# Altium PCB Left Eye Module.PcbDoc
Units mm, origin at the board's own origin, x right, y up, seen from the top; angles counter-clockwise.
Board outline 44.75 x 16 mm, 2 copper layers (Top Layer, Bottom Layer), stack 1.697 mm thick; 7 components, 8 nets, 23 pads, 11 vias.
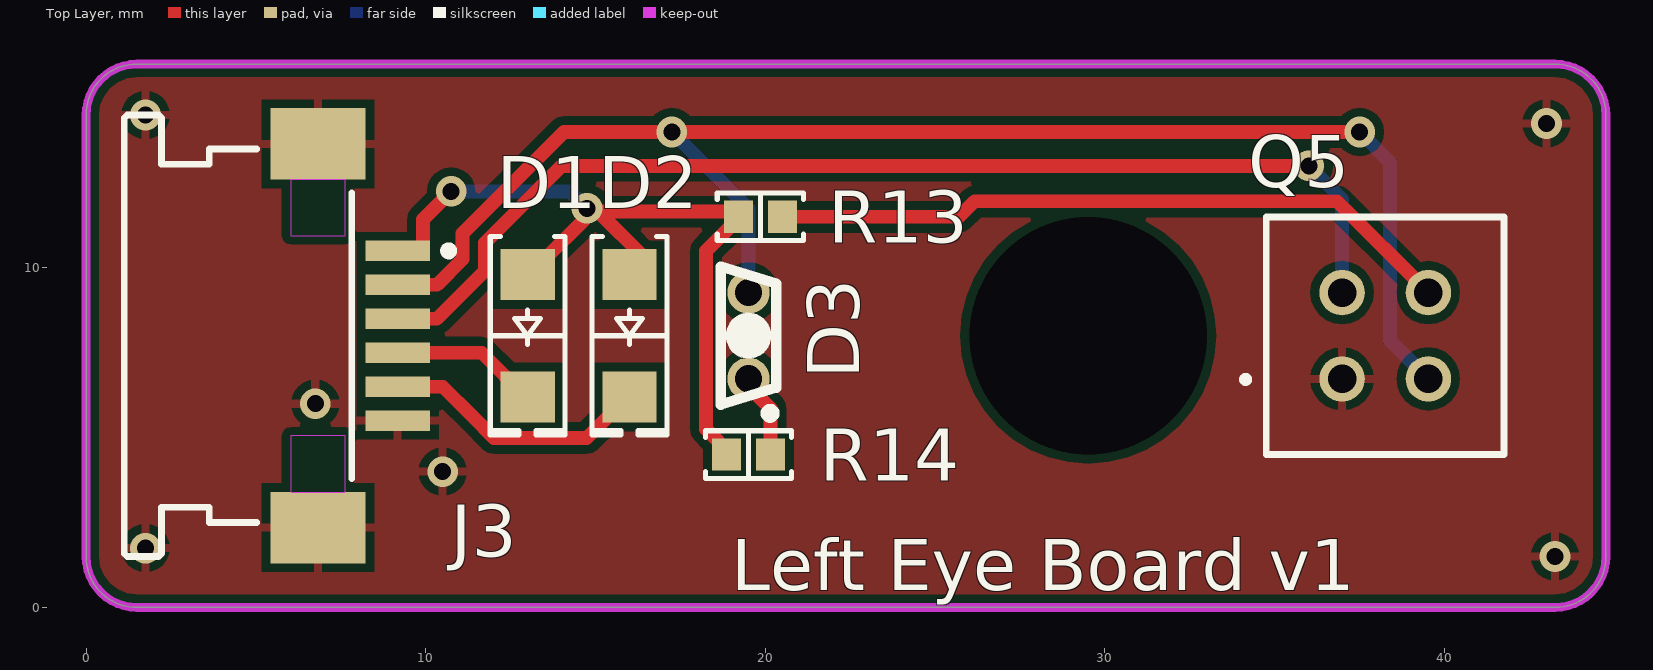
[diagram p0: Top Layer view]
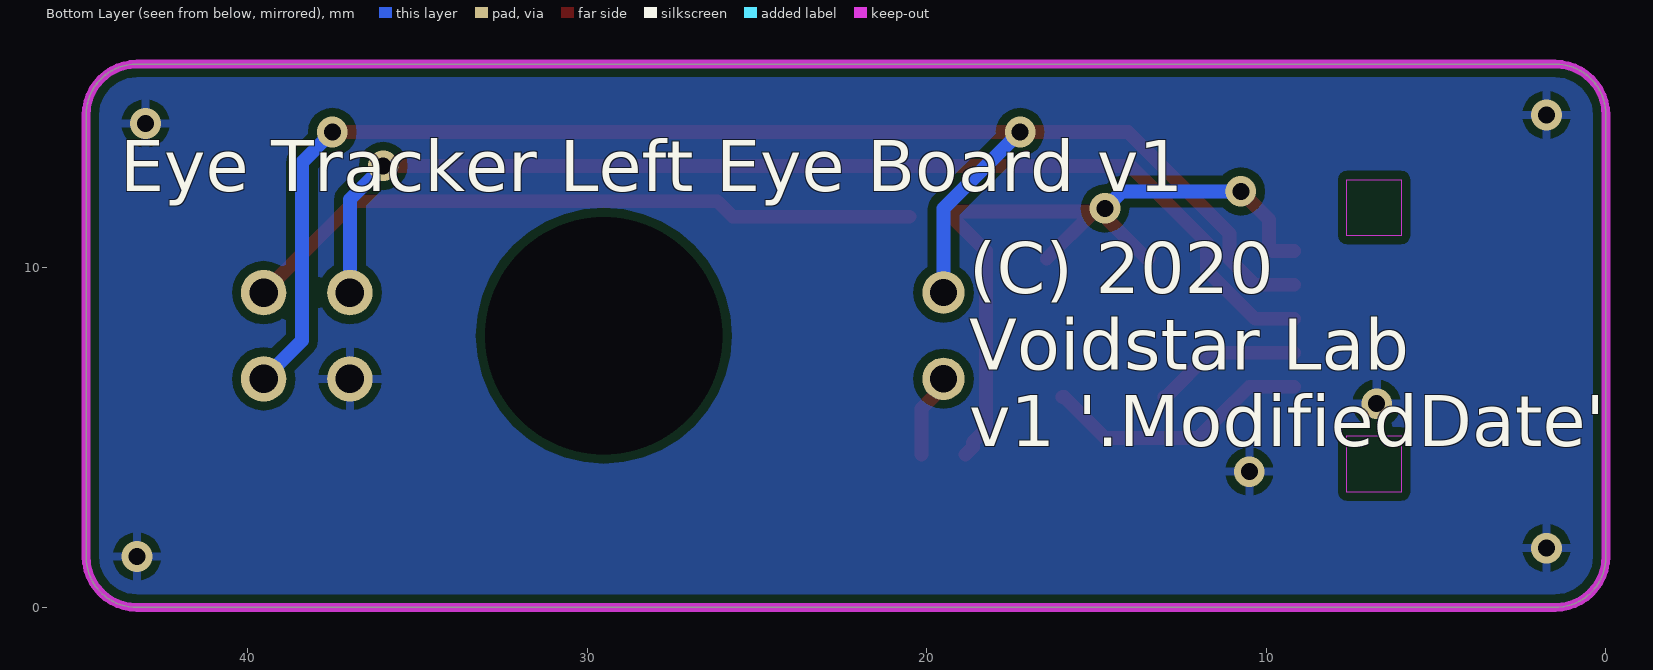
[diagram p1: Bottom Layer view, seen from below]
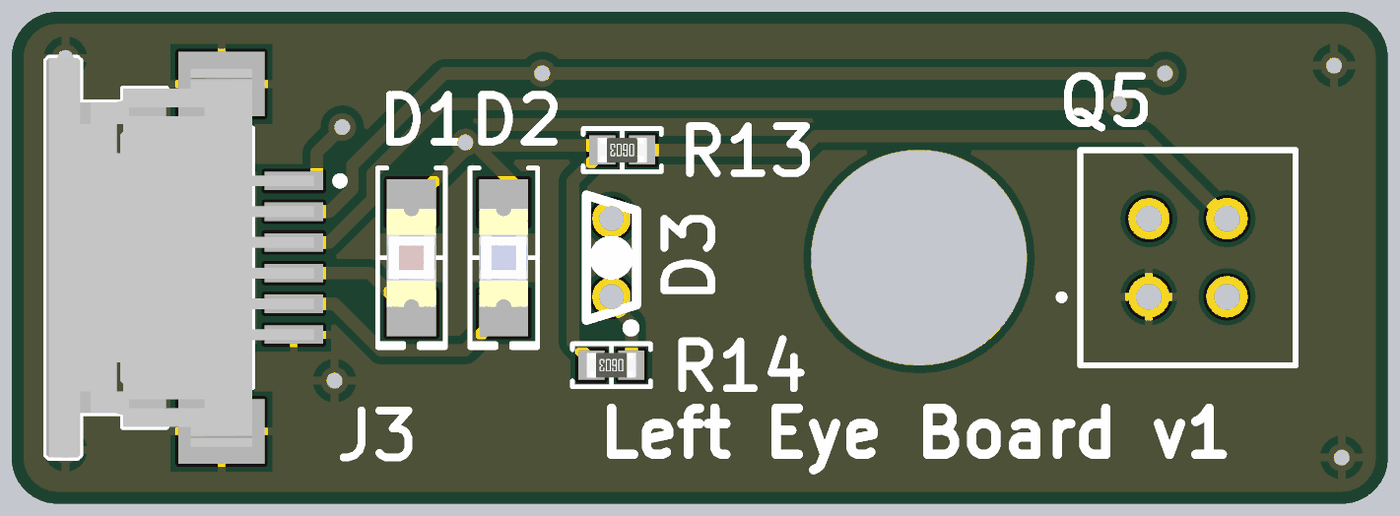
[diagram p2: 3D render of the assembled board from above, using the file's embedded part models]

## Layer stack, top to bottom
Top Solder: solder mask 0.0102, Solder Resist, Dk 3.5
Top Layer: signal copper 0.0356
Dielectric 1: dielectric 1.6256, FR-4, Dk 4.8
Bottom Layer: signal copper 0.0356
Bottom Solder: solder mask 0.0102, Solder Resist, Dk 3.5

## Board outline
1.5,0 cw(c1.5,1.5) 0,1.5 0,14.5 cw(c1.5,14.5) 1.5,16 43.25,16 cw(c43.25,14.5) 44.75,14.5 44.75,1.5 cw(c43.25,1.5) 43.25,0

## Design rules (kind name [scope] priority, off if disabled: settings)
Clearance [All] p1: gap=0.254 ignorepadtopadclearanceinfootprint=FALSE except(0: Arc-Hole Track-Hole SMDPad-Hole THPad-Hole Via-Hole Fill-Hole Poly-Hole Region-Hole Text-Hole)
PolygonConnect [All] p1: connectstyle=Relief reliefconductorwidth=0.254 reliefentries=4 polygonreliefangle="90 Angle" airgapwidth=0.254
RoomDefinition Sheet3 [InComponentClass('Sheet3')] p1: confinementstyle=ConfineIn formatcopy=TRUE lockcomponents=FALSE outline 0.5,0.75 42.25,0.75 42.25,15.25 0.5,15.25
RoutingVias [All] p1: holewidth=0.5 width=0.9 viastyle="Through Hole" minholewidth=0.5 minwidth=0.9 maxholewidth=1 maxwidth=1.4
SolderMaskExpansion "Tent Vias" [IsVia] p1: expansion=-5 istentingtop=TRUE
SolderMaskExpansion [All] p2: expansion=0.102 istentingtop=FALSE
Width [All] p1: maxlimit=0.813 minlimit=0.254 preferedwidth=0.406 minimp=50.000000 maximp=50.000000 favimp=50.000000
30 further rules are at their usual default settings.

## Components (designator, comment, footprint, x,y, rotation, side; value= is the part's Value field where it differs from the comment)
D1 "Red" "LED 1206_3216 RED" 13,8 r270 top
D2 "Blue" "LED 1206_3216 BLUE" 16,8 r270 top
D3 "=Value" OP269A 19.504,8.003 r90 top
J3 "52271-0679" MOLX-52271-0679 8,8 r270 top
Q5 "CNY70" CNY70 38.25,8 r0 top
R13 "100 Ohms" "RES 0603_1608" 19.854,11.503 r180 top
R14 "100 Ohms" "RES 0603_1608" 19.504,4.503 r180 top

## Footprints (in the part's own frame and the unit in brackets; to place one, negate y for a bottom-side part, rotate by r counter-clockwise, add the part's x,y. Pads: shape width x height; smd on the part's side, far side on the other; paste and mask are expansions set on the pad)
CNY70 [mm]
  round 1.34 hole 0.84: 1(-1.27,-1.27) 2(1.27,-1.27) 3(1.27,1.27) 4(-1.27,1.27)
  silkscreen extent -4.2,-3.5 3.5,3.5, body extent -3.5,-3.5 3.5,3.5, height 6
"LED 1206_3216 BLUE" [mm] "Chip Diode, 2-Leads, Body 3.13x1.55mm, IPC Medium Density"
  rect 1.5x1.6 smd: 1(-1.8,0) 2(1.8,0)
  silkscreen extent -2.92,-1.1 2.92,1.1, body extent -1.6,-0.8 1.6,0.8, height 0.9
"LED 1206_3216 RED" [mm] "Chip Diode, 2-Leads, Body 3.13x1.55mm, IPC Medium Density"
  rect 1.5x1.6 smd: 1(-1.8,0) 2(1.8,0)
  silkscreen extent -2.92,-1.1 2.92,1.1, body extent -1.6,-0.8 1.6,0.8, height 0.9
MOLX-52271-0679 [mm] "FPC Connector, 6-Leads, Right Angle, Pitch 1.0 mm, Mated Height 3.0 mm, SMT"
  rect 0.6x1.9 smd: 1(-2.5,1.175) 2(-1.5,1.175) 3(-0.5,1.175) 4(0.5,1.175) 5(1.5,1.175) 6(2.5,1.175)
  rect 2.1x2.8 smd: MP1(-5.65,-1.175) MP2(5.65,-1.175)
  Keep-Out Layer region: -4.6,-1.975 -2.95,-1.975 -2.95,-0.375 -4.6,-0.375
  Keep-Out Layer region: 2.95,-1.975 4.6,-1.975 4.6,-0.375 2.95,-0.375
  silkscreen extent -6.5,-6.87 6.5,2.8, body extent -6.5,-6.87 6.5,1.83, height 3.01
OP269A [mm] "Optek/TT Electronics Slim IR Emitter"
  round 1.25 hole 0.8: 1(-1.27,0) 2(1.27,0)
  silkscreen extent -2.41,-0.81 2.03,0.81, body extent -2.03,-0.81 2.79,0.82, height 6.1
"RES 0603_1608" [mm] "Chip Resistor, 2-Leads, Body 1.60x0.80mm, IPC Medium Density"
  rect 0.85x0.95 smd: 1(-0.65,0) 2(0.65,0)
  silkscreen extent -1.27,-0.7 1.27,0.7, body extent -0.8,-0.4 0.8,0.4, height 0.45

## Part data
D1: library part SML-LX1206IW-TR, "LED RED DIFFUSED 1206 SMD", Current - Test=20mA, Device Package="1206 (3216 Metric)", Lens Color=White, Manufacturer="Lumex Opto/Components Inc.", Millicandela Rating=6mcd, Supplier Device Package=1206, Supplier Part Number 1=67-1003-1-ND, Voltage - Forward (Vf) (Typ)=2V, Color=Red, ComponentLink1Description=Datasheet, ComponentLink1URL=https://www.lumex.com/content/files/ProductAttachment/SML-LX1206IW-TR.pdf, ComponentLink2Description="DigiKey Link", ComponentLink2URL=http://digikey.com/product-detail/en/lumex-opto-components-inc/SML-LX1206IW-TR/67-1003-1-ND/270801, Configuration=Standard, Height (Max)=1.10mm, LastUpdated="1/21/2020 3:14:28 AM", Lens Size="2.00mm x 1.60mm", Lens Style="Rectangle with Flat Top", Lens Transparency=Diffused, Lifecycle Status=Active, Minimum Order=1, Mounting Type="Surface Mount", Package / Case="1206 (3216 Metric)", Packaging=TapeAndReel, Part Number=SML-LX1206IW-TR, Part Status=Active, PartId=192, Price=0.08, Series=-, Size / Dimension="3.20mm L x 1.60mm W", Supplier 1=DigiKey, Viewing Angle=160°, Wavelength - Peak=635nm
D2: library part IN-S126ATB, "LED BLUE CLEAR 1206 SMD", Current - Test=20mA, Device Package="1206 (3216 Metric)", Lens Color=Clear, Manufacturer=Inolux, Millicandela Rating=140mcd, Supplier Device Package=1206, Supplier Part Number 1=1830-1088-1-ND, Voltage - Forward (Vf) (Typ)=3.2V, Color=Blue, ComponentLink1Description=Datasheet, ComponentLink1URL=http://www.inolux-corp.com/datasheet/SMDLED/Mono%20Color%20Top%20View/IN-S126AT%20Series_V1.0.pdf, ComponentLink2Description="DigiKey Link", ComponentLink2URL=http://digikey.com/product-detail/en/inolux/IN-S126ATB/1830-1088-1-ND/7604680, Configuration=Standard, Height (Max)=1.10mm, LastUpdated="1/21/2020 3:11:27 AM", Lens Size="2.00mm x 1.50mm", Lens Style="Rectangle with Flat Top", Lens Transparency=Clear, Lifecycle Status=Active, Minimum Order=1, Mounting Type="Surface Mount", Package / Case="1206 (3216 Metric)", Packaging=TapeAndReel, Part Number=IN-S126ATB, Part Status=Active, PartId=723, Price=0.07, Series=IN-S126AT, Size / Dimension="3.20mm L x 1.50mm W", Supplier 1=DigiKey, Viewing Angle=120°, Wavelength - Dominant=468nm, Wavelength - Peak=472nm
D3: library part LED, "Chip LED"
J3: "1.0 mm Pitch Easy-On(TM) Type FPC Connector, 3.0 mm Mated Height, Right Angle, ZIF, SMT, Bottom Contact, 6 Circuits, -40 to 85 degC, ELV and RoHS Compliant, Tape and Reel", Current (Max per Contact)=0.5A, Manufacturer=Molex, Supplier Part Number 1=1079950, Voltage (Max)="50V AC (RMS)/DC", Circuits (Loaded)=6, ComponentLink1Description="Manufacturer URL", ComponentLink1URL=http://www.molex.com/molex/index.jsp, ComponentLink2Description=Datasheet, ComponentLink2URL=http://www.molex.com/webdocs/datasheets/pdf/en-us/0522710679_FFC_FPC_CONNECTORS.pdf, ComponentLink3Description="Package Specification", ComponentLink3URL=http://www.molex.com/pdm_docs/sd/522710679_sd.pdf, Contact Position=Bottom, Durability (mating cycles max)=30, Entry Angle="90degrees Angle", Mated Height=3.00mm, Material - Metal="Phosphor Bronze", Material - Plating Mating=Tin-Bismuth, Material - Plating Termination=Tin-Bismuth, Mounting Technology="Surface Mount", Number of Rows=1, Orientation="Right Angle", PackageDescription="6-Lead FPC Connector, Pitch 1.0 mm", PackageReference=52271-0679, PackageVersion="Rev. B, 04/2004", Packing="Tape and Reel", PartNumber=52271-0679, PCB Locator=No, PCB Retention=Yes, Pitch - Mating Interface=1.00mm, Pitch - Termination Interface=1.00mm, Polarized to PCB=Yes, RoHS=TRUE, Stackable=No, Supplier 1=Farnell, Supplier 2=Newark, Supplier 3=Mouser, Supplier Part Number 2=58J9529, Supplier Part Number 3=538-52271-0679, System=Connector
Q5: "Transistor", Manufacturer_Name=Vishay, Mouser2 Part Number=782-CNY70, Datasheet Link=https://componentsearchengine.com//CNY70.pdf, Manufacturer_Part_Number=CNY70, Mouser2 Price/Stock=https://www.mouser.com/Search/Refine.aspx?Keyword=782-CNY70
R13 R14: library part RMCF0603FG100R, "RES 100 OHM 1% 1/10W 0603", Device Package="0603 (1608 Metric)", Manufacturer="Stackpole Electronics Inc", Operating Temperature="-55°C ~ 155°C", Power (Watts)="0.1W, 1/10W", Ratings=AEC-Q200, Supplier Device Package=0603, Supplier Part Number 1=RMCF0603FG100RCT-ND, Temperature Coefficient=±100ppm/°C, Tolerance=±1%, ComponentLink1Description=Datasheet, ComponentLink1URL=https://www.seielect.com/catalog/sei-rmcf_rmcp.pdf, ComponentLink2Description="DigiKey Link", ComponentLink2URL=http://digikey.com/product-detail/en/stackpole-electronics-inc/RMCF0603FG100R/RMCF0603FG100RCT-ND/4425033, Composition="Thick Film", Features="Automotive AEC-Q200", Height - Seated (Max)="0.022\" (0.55mm)", LastUpdated="1/21/2020 12:16:25 AM", Lifecycle Status=Active, Minimum Order=1, Number of Terminations=2, Package / Case="0603 (1608 Metric)", Packaging=CutTape, Part Number=RMCF0603FG100R, Part Status=Active, PartId=24036, Price=0.10, Resistance="100 Ohms", Series=RMCF, Size / Dimension="0.061\" L x 0.031\" W (1.55mm x 0.80mm)", Supplier 1=DigiKey

## Free pads (board coordinates)
  round 1.25 hole 7: K(29.504,8.003)

## Via types
v1: diameter 0.9, hole 0.5, Top Layer to Bottom Layer, tented both sides, 11 vias

## Nets (pads, with @x,y where several pads share a name; then routed paths per layer and width w, separated by ;. In a path a pad name is that pad's centre, name@x,y a point inside that pad or via, vN(x,y) a via of type N, cw(c..) or ccw(c..) an arc to the next point about the centre after c; other vN are vias at no path point)
BLINK_L: J3.3 Q5.4 | length 33.3
  Top Layer w0.406: J3.3 10.328,8.5 11.743,9.915 11.743,10.739 14.003,13 v1(36,13)
  Bottom Layer w0.406: v1(36,13) 36.98,12.02 Q5.4
GND: J3.6 J3.MP1 J3.MP2 Q5.1
  other v1: 43.25,1.5 1.75,1.75 10.5,4 6.75,6 43,14.25 1.75,14.5
LED_IR_L: D3.2 J3.2 Q5.2 | length 44.4
  Top Layer w0.406: J3.2 10.328,9.5 11.082,10.254 11.082,11.013 14.069,14 v1(37.5,14)
  Bottom Layer w0.406: v1(17.25,14) 19.5,11.75 19.5,9.277 D3.2 ; v1(37.5,14) 38.393,13.107 38.393,7.857 Q5.2
LED_STATUS_B: D2.2 J3.5 | length 7.9
  Top Layer w0.406: J3.5 10.503,6.5 11.373,5.631 12.011,4.993 14.743,4.993 15.95,6.2 D2.2
LED_STATUS_R: D1.2 J3.4 | length 4.4
  Top Layer w0.406: J3.4 11.65,7.5 12.95,6.2 D1.2
NetD3_1: D3.1 R14.1 | length 2.5
  Top Layer w0.406: D3.1 19.504,6.505 20.154,5.855 R14.1
NetQ5_3: Q5.3 R13.1 | length 20.3
  Top Layer w0.406: R13.1 25.706,11.503 26.164,11.96 36.83,11.96 Q5.3
VCC: D1.1 D2.1 J3.1 R13.2 R14.2 | length 23.2
  Top Layer w0.406: J3.1 9.825,10.5 9.922,10.597 9.922,11.422 v1(10.75,12.25) ; D1.1@13.467,10.267 13.517,10.267 14.656,11.406 14.656,11.656 v1(14.75,11.75) 14.844,11.656 v1@15.078,11.656 ; D2.1@16.467,10.267 v1@15.078,11.656 ; R14.2 18.633,4.725 18.633,4.867 18.25,5.25 18.25,10.498 19.204,11.453 R13.2 19.052,11.656 v1@15.078,11.656
  Bottom Layer w0.406: v1(10.75,12.25) 14.25,12.25 v1(14.75,11.75)

## Polygon pours and split planes (outlines as drawn)
GND on Bottom Layer "BOTTOM GND" (solid, pour order 0): 0,1.5 0,14.5 cw(c1.5,14.5) 1.5,16 43.25,16 cw(c43.25,14.5) 44.75,14.5 44.75,1.5 cw(c43.25,1.5) 43.25,0 1.5,0 cw(c1.5,1.5)
GND on Top Layer "TOP GND" (solid, pour order 1): 0,1.5 0,14.5 cw(c1.5,14.5) 1.5,16 43.25,16 cw(c43.25,14.5) 44.75,14.5 44.75,1.5 cw(c43.25,1.5) 43.25,0 1.5,0 cw(c1.5,1.5)

## Keep-outs
Keep-Out Layer:
  lines w0.254: 1.5,16 ccw(c1.5,14.5) 0,14.5 0,1.5 ccw(c1.5,1.5) 1.5,0 43.25,0 ccw(c43.25,1.5) 44.75,1.5 44.75,14.5 ccw(c43.25,14.5) 43.25,16 1.5,16 ; 1.5,16 1.5,16

## Silkscreen, mask and mechanical layers (free items; w line width, h text height)
Top Overlay:
  text "Left Eye Board v1" at 19,0.5 h1.5
Bottom Overlay:
  text "Eye Tracker Left Eye Board v1" at 43.75,12.25 h1.5
  text "(C) 2020  / Voidstar Lab / v1 '.ModifiedDate'" at 18.75,4.75 h1.5
Mechanical 1:
  lines w0.305: 22.004,3.503 34.004,3.503 34.004,12.503 22.004,12.503 22.004,3.503